# Altium PCB LEDArray8KeyRevB.PcbDoc (part 4 of 4)
Units mm, origin at the board's own origin, x right, y up, seen from the top; angles counter-clockwise.
Board outline 120 x 84.91 mm, 2 copper layers (Top Layer, Bottom Layer); 250 components, 219 nets, 891 pads, 234 vias.
Unrouted connection lines stored in the file: 34.
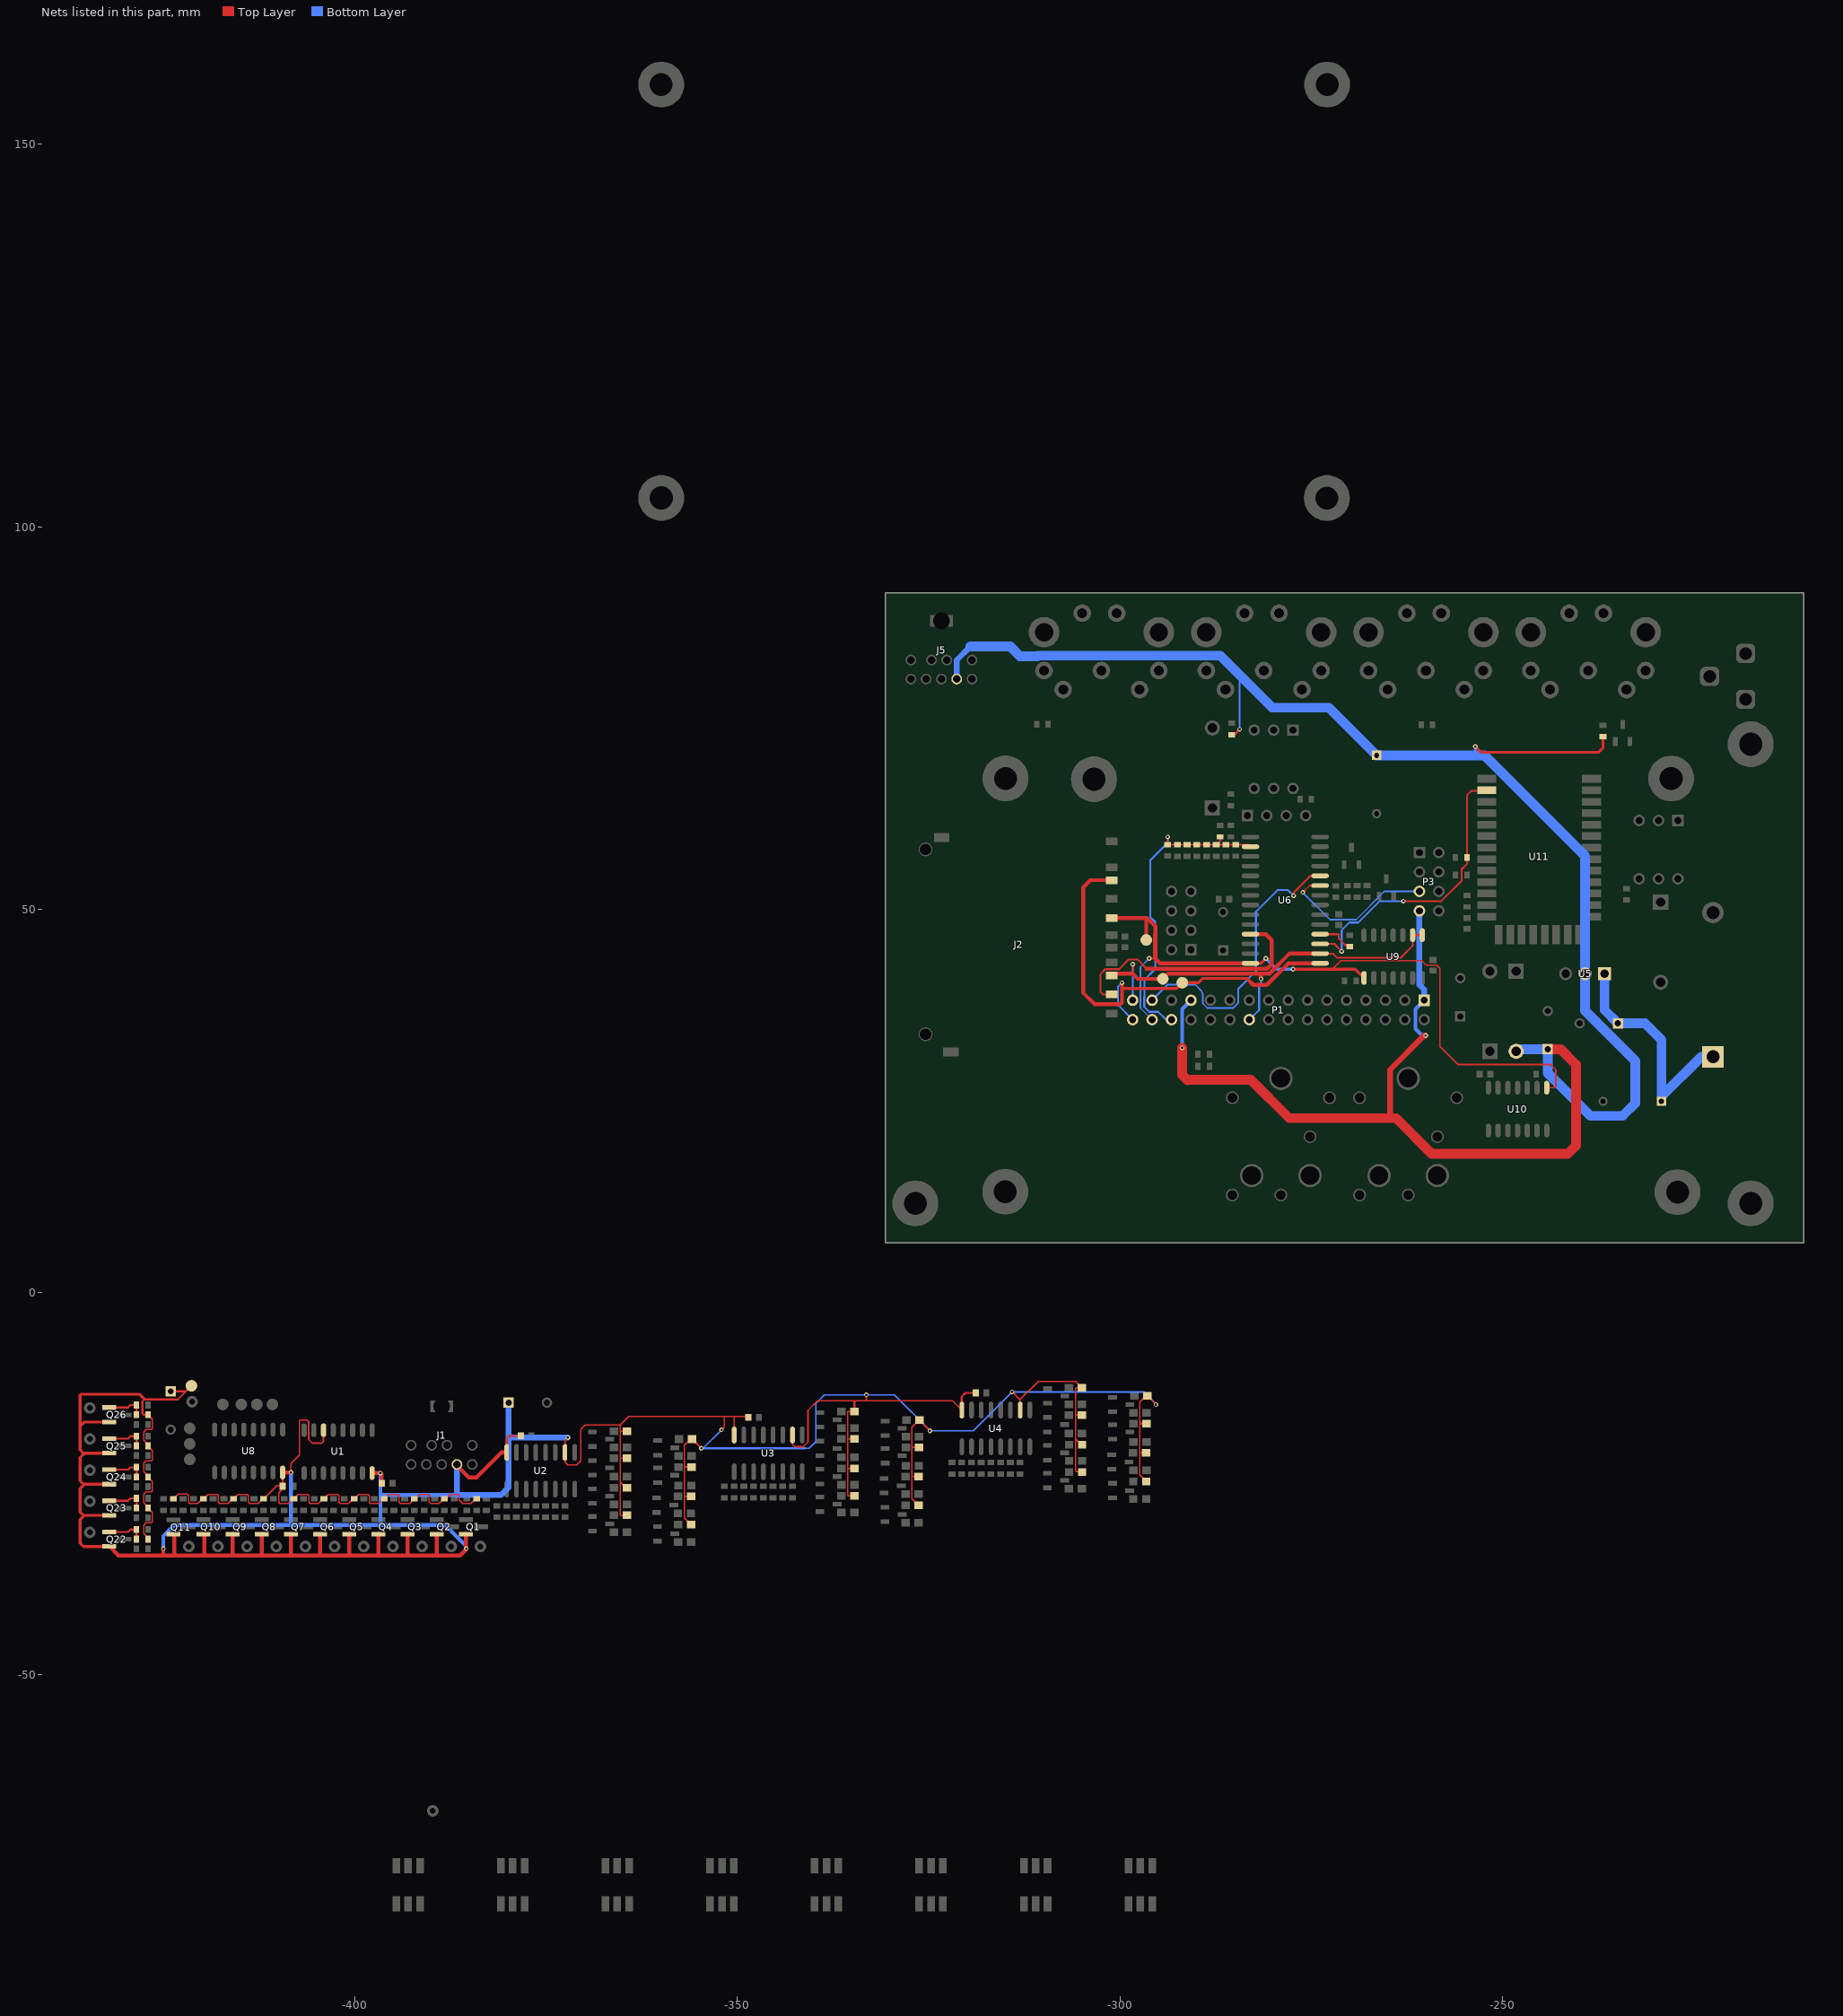
[diagram p4: the nets of this part, all layers, seen from the top]

## Via types
v1: diameter 0.6, hole 0.3, Top Layer to Bottom Layer, 234 vias

## Nets (pads, with @x,y where several pads share a name; then routed paths per layer and width w, separated by ;. In a path a pad name is that pad's centre, name@x,y a point inside that pad or via, vN(x,y) a via of type N, cw(c..) or ccw(c..) an arc to the next point about the centre after c; other vN are vias at no path point) (continued)
SD_CS: J2.1 U6.11 | length 34.1
  Top Layer w0.254: J2.1@-301.081,38.917 -302.232,38.917 -302.531,39.216 -302.531,41.612 -301.947,42.197 -301.922,42.197 -301.896,42.223 -300.118,42.223 -298.848,43.493 -297.705,43.493 -296.562,42.35 -296.562,42.279
  Top Layer w0.508: -296.562,42.279 -280.758,42.279 -280.179,42.858 -280.179,46.033 -280.941,46.795 U6.11@-282.951,46.795
SPARE: P3.5 U6.23 | length 20.9
  Top Layer w0.203: v1(-276.115,52.256) -275.226,53.145 U6.23@-273.851,53.145
  Bottom Layer w0.203: v1(-276.115,52.256) -272.559,48.7 -269.13,48.7 -265.447,52.383 P3.5@-260.875,52.383
SPARE1: Q22.1 R82.2 R92.2 | length 5
  Top Layer w0.254: Q22.1@-432.038,-31.308 -429.58,-31.308 -429.26,-30.988 R92.2@-428.486,-30.988 R82.2@-428.486,-32.258
SPARE2: Q23.1 R83.2 R93.2 | length 5
  Top Layer w0.254: Q23.1@-432.038,-27.244 -429.58,-27.244 -429.26,-26.924 R93.2@-428.486,-26.924 R83.2@-428.486,-28.194
SPARE3: Q24.1 R84.2 R94.2 | length 5
  Top Layer w0.254: Q24.1@-432.038,-23.18 -429.58,-23.18 -429.26,-22.86 R94.2@-428.486,-22.86 R84.2@-428.486,-24.13
SPARE4: Q25.1 R85.2 R95.2 | length 5
  Top Layer w0.254: Q25.1@-432.038,-19.116 -429.58,-19.116 -429.26,-18.796 R95.2@-428.486,-18.796 R85.2@-428.486,-20.066
SPARE5: Q26.1 R86.2 R96.2 | length 5
  Top Layer w0.254: Q26.1@-432.038,-15.052 -429.58,-15.052 -429.26,-14.732 R96.2@-428.486,-14.732 R86.2@-428.486,-16.002
SPI_CLK: J2.5 P1.30 pad.0@-296.563,46.033 U6.14 U9.8 U10.8 | length 100.1
  Top Layer w0.203: v1(-296.181,43.62) -295.419,43.62 ; -272.307,42.223 -272.26,42.223 -271.164,43.319 -260.576,43.319 -259.988,42.731 -258.589,42.731 -258.543,42.685 ; -258.542,42.685 -258.208,42.351 -258.208,32.151 -255.808,29.751 -243.73,29.751 -243.044,29.065 -243.044,26.983 -243.292,26.735 U10.8@-244.245,26.735
  Top Layer w0.381: U6.14@-282.951,42.985 -281.576,42.985 v1(-280.941,43.62) ; v1(-277.385,42.223) -272.307,42.223 ; -272.26,42.223 -269.263,42.223 U9.8@-268.114,41.074
  Top Layer w0.508: J2.5@-301.081,48.917 -296.469,48.917 ; pad.0@-296.563,46.033 -296.563,48.823 -296.469,48.917 ; -295.419,43.62 -295.419,46.758 ; U6.14@-282.951,42.985 -294.784,42.985 -295.363,43.565 -295.363,47.811 -296.469,48.917
  Bottom Layer w0.203: v1(-296.181,43.62) -297.324,42.477 -297.324,37.143 P1.30@-295.8,35.619
  Bottom Layer w0.381: v1(-280.941,43.62) -279.544,42.223 v1(-277.385,42.223)
SPI_MISO: J2.7 P1.32 pad.0@-291.863,40.445 U6.15 | length 60.1
  Top Layer w0.254: -283.38,40.958 -283.354,41.022
  Top Layer w0.381: -299.734,39.683 -292.625,39.683 pad.0@-291.863,40.445 -289.715,40.445 -289.139,41.022 -283.354,41.022
  Top Layer w0.508: J2.7@-301.081,53.847 -303.861,53.847 -304.817,52.891 -304.817,39.148 -303.32,37.651 -299.963,37.651 -299.734,37.88 -299.734,39.683 v1(-299.734,40.448) ; -283.38,40.958 -282.588,40.166 -280.814,40.166 -277.994,42.985 U6.15@-273.851,42.985
  Bottom Layer w0.254: v1(-299.734,40.448) -300.245,39.937 -300.245,37.524 P1.32@-298.34,35.619
SPI_MOSI: J2.2 P1.20 P1.31 pad.0@-294.403,40.953 U6.16 U9.1 U9.2 | length 57.2
  Top Layer w0.254: -298.34,41.618 v1(-298.34,42.858) ; U6.16@-273.851,44.255 -272.178,44.255 -271.623,43.7 -263.335,43.7 -261.764,45.271 U9.2@-261.764,46.674 U9.1@-260.494,46.674
  Top Layer w0.508: J2.2@-301.081,41.417 -300.88,41.618 -298.34,41.618 -297.675,40.953 pad.0@-294.403,40.953 -293.738,41.618 -281.576,41.618 ; v1(-281.576,40.953) -281.576,41.618 ; U6.16@-273.851,44.255 -277.848,44.255 -280.485,41.618 -281.576,41.618
  Bottom Layer w0.254: P1.31@-298.34,38.159 v1(-298.34,42.858) ; P1.20@-283.1,35.619 -281.83,36.889 -281.83,40.191 -281.576,40.445 v1(-281.576,40.953)
TP_CS: P1.29 U6.24 | length 38.5
  Top Layer w0.254: v1(-277.301,51.816) -277.301,52.213 -275.099,54.415 U6.24@-273.851,54.415
  Bottom Layer w0.203: -290.163,40.191 -289.317,39.345 -289.317,39.2 -289.184,39.066 -289.184,37.743 -288.596,37.155 -285.188,37.155 -285.175,37.169
  Bottom Layer w0.254: P1.29@-295.8,38.159 -293.768,40.191 -290.163,40.191 ; -285.175,37.169 -284.536,37.808 -284.536,39.672 -282.236,41.972 -282.236,49.731 -279.417,52.551 -278.036,52.551 v1(-277.301,51.816)
TP_IRQ: P1.28 R59.1 R66.2 R67.2 R68.1 R69.2 R70.1 R71.1 R72.1 R73.1 U6.2 | length 41.5
  Top Layer w0.254: v1(-293.768,59.495) R70.1@-293.768,58.493 -293.768,58.467 -292.51,58.467 R71.1@-292.498,58.479 ; R71.1@-292.49,58.487 -291.228,58.487 -289.958,58.487 R68.1@-288.688,58.487 ; R68.1@-288.688,58.479 R68.1@-288.688,58.487 ; R69.2@-287.418,58.479 R69.2@-287.41,58.487 ; R59.1@-286.91,59.507 -286.91,58.987 R69.2@-287.41,58.487 ; U6.2@-282.951,58.225 -283.213,58.487 R66.2@-284.856,58.487 -286.148,58.487 R69.2@-287.41,58.487 ; R68.1@-288.688,58.487 R69.2@-287.41,58.487
  Bottom Layer w0.254: v1(-293.768,59.495) -293.768,58.717 -296.028,56.457 -296.028,49.03 -295.397,48.399 -295.397,42.245 -296.816,40.826 -296.816,38.612 -296.829,38.599 -296.829,37.284 -296.194,36.649 -294.991,36.649 -293.962,35.619 P1.28@-293.26,35.619
TX1: R65_IO1.2 U6.18 | length 4.9
  Top Layer w0.254: U6.18@-273.851,46.795 -271.404,46.795 -271.404,46.208 -270.568,45.373 -270.18,45.373 R65_IO1.2@-269.963,45.156
TX2: R65_IO2.2 U6.17 U11.2 | length 37.8
  Top Layer w0.254: U6.17@-273.851,45.525 -272.009,45.525 v1(-271.035,44.551) ; v1(-262.963,51.113) -258.032,51.113 -255.363,53.782 -255.363,55.251 -254.664,55.951 R65_IO2.2@-254.664,56.828 -254.664,64.944 -254.108,65.5 U11.2@-252.92,65.5
  Bottom Layer w0.254: v1(-271.035,44.551) -271.035,47.305 -270.021,48.319 -268.864,48.319 -266.07,51.113 v1(-262.963,51.113)
VCC: C1.1 C2.1 C3.2 C4.2 C5.2 C7.1 C14.1 C15.1 C17.1 D1.1 J1.8 J5.8 P1.1 P1.25 P3.7 pad.0@-421.31,-12.217 Q1.2 Q2.2 Q3.2 Q4.2 Q5.2 Q6.2 Q7.2 Q8.2 Q9.2 Q10.2 Q11.2 Q22.2 Q23.2 Q24.2 Q25.2 Q26.2 R2_NPNA.1 R2_NPNB.1 R2_NPNC.1 R5_NPNA.1 R5_NPNB.1 R5_NPNC.1 R8_NPNA.1 R8_NPNB.1 R8_NPNC.1 R11_NPNA.1 R11_NPNB.1 R11_NPNC.1 R14_NPNA.1 R14_NPNB.1 R14_NPNC.1 R17_NPNA.1 R17_NPNB.1 R17_NPNC.1 R20_NPNA.1 R20_NPNB.1 R20_NPNC.1 R23_NPNA.1 R23_NPNB.1 R23_NPNC.1 R36.1 R37.1 R38.1 R39.1 R40.1 R41.1 R42.1 R43.1 R44.1 R45.1 R46.1 R64_IO1.2 R64_IO2.2 R82.1 R83.1 R84.1 R85.1 R86.1 U1.6 U1.16 U2.10 U2.16 U3.10 U3.16 U4.10 U4.16 U5.3 U8.16 | length 889.9
  Top Layer w0.152: R82.1@-426.986,-32.258 -426.986,-32.111 -427.565,-31.533 -427.565,-30.443 -427.264,-30.143 -426.541,-30.143 -426.407,-30.009 -426.407,-28.785 -426.986,-28.207 R83.1@-426.986,-28.194 -426.986,-28.047 -427.565,-27.469 -427.565,-26.379 -427.264,-26.079 -426.541,-26.079 -426.407,-25.945 -426.407,-24.721 -426.986,-24.143 R84.1@-426.986,-24.13 -426.986,-23.983 -427.565,-23.405 -427.565,-22.315 -427.264,-22.015 -426.541,-22.015 -426.407,-21.881 -426.407,-20.657 -426.986,-20.079 R85.1@-426.986,-20.066 -426.986,-19.919 -427.565,-19.341 -427.565,-18.251 -427.264,-17.951 -426.541,-17.951 -426.407,-17.817 -426.407,-16.593 -426.986,-16.015 R86.1@-426.986,-16.002 ; R46.1@-423.689,-27.004 -423.042,-26.357 -421.911,-26.357 -421.7,-26.567 -421.7,-27.449 -421.566,-27.582 -420.477,-27.582 -419.899,-27.004 R45.1@-419.752,-27.004 -419.173,-26.425 -417.937,-26.425 -417.803,-26.559 -417.803,-27.409 -417.629,-27.582 -416.54,-27.582 -415.962,-27.004 R44.1@-415.815,-27.004 -415.236,-26.425 -414,-26.425 -413.866,-26.559 -413.866,-27.409 -413.692,-27.582 -412.603,-27.582 -412.025,-27.004 R43.1@-411.878,-27.004 -410.102,-25.228 C1.1@-409.389,-25.228 ; C1.1@-409.403,-25.341 C1.1@-409.389,-25.228 ; -390.161,-27.5 -390.153,-27.5 ; R36.1@-384.065,-27.004 -384.212,-27.004 -384.79,-27.582 -385.879,-27.582 -386.307,-27.155 -386.307,-26.559 -386.441,-26.425 -387.53,-26.425 -388.109,-27.004 R37.1@-388.256,-27.004 -388.403,-27.004 -388.981,-27.582 -390.07,-27.582 ; v1(-372.127,-18.991) -372.508,-19.372 U2.10@-372.508,-20.919 -372.508,-22.166 -372.127,-22.547 -370.984,-22.547 -370.45,-22.013 -370.45,-17.899 -369.891,-17.34 -365.269,-17.34 -365.269,-18.139 ; R20_NPNA.1@-364.419,-21.695 -365.269,-21.695 ; R23_NPNA.1@-364.419,-18.139 -365.269,-18.139 ; R14_NPNA.1@-364.406,-29.137 -364.42,-29.151 -365.269,-29.151 -365.269,-24.782 ; R17_NPNA.1@-364.401,-25.544 -364.507,-25.544 -365.269,-24.782 ; R5_NPNA.1@-356.037,-26.638 -356.887,-26.638 ; R11_NPNA.1@-356.037,-19.145 -356.15,-19.258 -356.887,-19.995 -356.887,-26.638 ; R2_NPNA.1@-356.019,-30.36 -356.037,-30.321 -356.887,-29.471 -356.887,-26.638 ; R20_NPNB.1@-334.701,-19.155 -335.551,-19.155 ; R23_NPNB.1@-334.701,-15.599 -335.551,-15.599 -335.551,-19.155 ; R14_NPNB.1@-334.688,-26.597 -334.702,-26.611 -335.551,-26.611 -335.551,-23.055 ; R17_NPNB.1@-334.683,-23.004 -335.5,-23.004 -335.551,-23.055 ; R5_NPNB.1@-326.319,-24.098 -327.169,-24.098 ; R2_NPNB.1@-326.301,-27.82 -326.319,-27.781 -327.169,-26.931 -327.169,-24.098 ; R8_NPNB.1@-326.266,-20.237 R8_NPNB.1@-326.266,-20.282 -327.148,-20.282 -327.169,-20.261 ; R11_NPNB.1@-326.192,-16.679 -327.169,-17.656 -327.169,-20.261 ; v1(-314.088,-13.022) -313.043,-14.066 ; U4.10@-313.043,-15.381 -313.043,-14.066 ; R20_NPNC.1@-304.962,-16.041 -305.812,-16.041 ; R14_NPNC.1@-304.949,-23.483 -304.996,-23.436 -305.706,-23.436 -305.812,-23.33 -305.812,-19.128 ; R17_NPNC.1@-304.944,-19.89 -305.05,-19.89 -305.812,-19.128 ; R5_NPNC.1@-296.58,-20.984 -297.43,-20.984 ; R11_NPNC.1@-296.58,-13.491 -296.693,-13.604 -297.43,-14.341 -297.43,-20.984 ; R2_NPNC.1@-296.562,-24.706 -296.58,-24.667 -297.43,-23.817 -297.43,-20.984 ; C1.1@-409.389,-25.228 -409.389,-25.69 -409.889,-26.191 -409.889,-27.449 -409.755,-27.582 -408.666,-27.582 -408.088,-27.004 R42.1@-407.941,-27.004 -407.362,-26.425 -406.126,-26.425 -405.992,-26.559 -405.992,-27.409 -405.818,-27.582 -404.729,-27.582 -404.151,-27.004 R41.1@-404.004,-27.004 -403.425,-26.425 -402.189,-26.425 -402.055,-26.559 -402.055,-27.409 -401.881,-27.582 -400.792,-27.582 -400.214,-27.004 R40.1@-400.067,-27.004 -399.488,-26.425 -398.252,-26.425 -398.078,-26.599 -398.078,-27.449 -397.944,-27.582 -396.855,-27.582 -396.277,-27.004 R39.1@-396.13,-27.004 -395.551,-26.425 -394.315,-26.425 -394.181,-26.559 -394.181,-27.409 -394.007,-27.582 -392.791,-27.582 -392.213,-27.004 R38.1@-392.193,-27.004 -392.066,-27.004 -391.487,-26.425 -390.378,-26.425 -390.244,-26.559 -390.244,-27.409 -390.153,-27.5 ; -390.153,-27.5 -390.07,-27.582 ; -390.153,-27.5 -390.07,-27.582 ; -365.269,-24.782 -365.269,-21.695 ; -365.269,-21.695 -365.269,-18.139 ; -335.551,-23.055 -335.551,-19.155 ; -327.169,-24.098 -327.169,-20.261 ; -313.043,-14.066 -313.043,-14.009 -310.659,-11.625 -305.822,-11.625 R23_NPNC.1@-304.962,-12.485 -305.812,-12.485 -305.812,-16.041 ; -305.812,-19.128 -305.812,-16.041
  Top Layer w0.203: v1(-408.306,-23.543) -408.306,-22.373 -407.21,-21.277 -407.21,-16.834 -407.077,-16.701 -406.216,-16.701 -405.991,-16.926 -405.991,-19.237 -405.53,-19.698 -404.26,-19.698 -404.055,-19.493 U1.6@-404.055,-18.02 ; -365.269,-17.34 -364.163,-16.234 -351.68,-16.234 ; -356.88,-22.801 -356.859,-22.822 R8_NPNA.1@-355.984,-22.822 ; v1(-352.061,-17.975) -351.68,-17.594 -351.68,-16.234 ; U3.16@-350.399,-18.647 -350.399,-16.246 -350.41,-16.234 ; C4.2@-348.57,-16.324 -348.659,-16.234 -350.41,-16.234 ; U3.10@-342.779,-18.647 -342.779,-19.891 -342.498,-20.171 -341.997,-20.171 -341.99,-20.179 -341.369,-20.179 -340.758,-19.568 -340.758,-15.435 -339.488,-14.165 -333.265,-14.165 ; v1(-333.138,-13.403) -333.138,-14.038 -333.265,-14.165 ; U4.16@-320.692,-15.352 -321.879,-14.165 -333.265,-14.165 ; R11_NPNC.1@-296.435,-13.53 v1(-295.292,-14.673) ; -351.68,-16.234 -350.41,-16.234
  Top Layer w0.254: R86.1@-426.986,-16.002 -427.533,-16.002 -427.711,-15.824 -427.711,-14.249 -427.699,-14.249 -427.452,-14.003 -423.095,-14.003 -422.041,-12.949 ; C15.1@-424.028,-12.949 -422.041,-12.949 ; pad.0@-421.31,-12.217 -422.041,-12.949 ; C1.1@-409.389,-25.228 U8.16@-409.389,-23.543 ; U2.16@-380.128,-20.819 -380.128,-19.155 -379.747,-18.774 -378.288,-18.774 C3.2@-378.288,-18.747 ; R11_NPNA.1@-355.892,-19.184 v1(-354.688,-20.388) ; R23_NPNB.1@-334.701,-15.599 -334.701,-14.204 ; R11_NPNB.1@-326.192,-16.679 -326.181,-16.742 v1(-324.82,-18.102) ; U4.16@-320.663,-15.381 -320.692,-15.352 -320.692,-13.657 -320.184,-13.149 C5.2@-318.852,-13.149 ; -297.353,-17.168 R8_NPNC.1@-296.527,-17.168 ; R64_IO1.2@-285.386,72.842 -285.078,72.842 v1(-284.37,73.551)
  Top Layer w0.381: Q22.2@-432.038,-33.208 -435.422,-33.208 -435.864,-32.766 -435.864,-29.718 -435.29,-29.144 ; Q23.2@-432.038,-29.144 -435.29,-29.144 ; Q24.2@-432.038,-25.08 -435.29,-25.08 ; Q25.2@-432.038,-21.016 -435.29,-21.016 ; Q26.2@-432.038,-16.952 -435.29,-16.952 -435.864,-17.526 ; -427.497,-13.958 -428.145,-13.31 -435.712,-13.31 -435.864,-13.462 -435.864,-17.526 ; v1(-253.563,71.306) -252.808,70.551 -237.507,70.551 -236.884,71.174 R64_IO2.2@-236.884,72.588 ; -435.864,-17.526 -435.864,-20.574 -435.422,-21.016 -435.29,-21.016 ; -435.29,-29.144 -435.422,-29.144 -435.864,-28.702 -435.864,-25.654 -435.29,-25.08 ; -435.29,-25.08 -435.422,-25.08 -435.864,-24.638 -435.864,-21.59 -435.29,-21.016
  Top Layer w0.508: Q22.2@-432.038,-33.208 -430.862,-34.384 -425.018,-34.384 ; v1(-424.993,-33.503) -424.993,-34.359 -425.018,-34.384 ; Q11.2@-423.673,-31.625 -423.546,-31.752 -423.546,-34.335 -423.596,-34.384 ; -419.609,-34.053 Q10.2@-419.609,-31.574 ; -415.926,-34.078 Q9.2@-415.926,-31.599 ; -412.116,-34.078 Q8.2@-412.116,-31.599 ; U8.16@-409.389,-23.543 v1(-408.306,-23.543) ; Q7.2@-408.306,-31.599 -408.306,-34.335 -408.356,-34.384 ; -404.496,-34.078 Q6.2@-404.496,-31.599 ; -400.686,-34.078 Q5.2@-400.686,-31.599 ; U1.16@-397.705,-23.62 v1(-396.622,-23.62) -396.449,-23.793 C2.1@-396.449,-24.96 ; Q4.2@-396.876,-31.599 -396.876,-34.284 -396.977,-34.384 ; Q3.2@-393.066,-31.599 -393.066,-34.384 ; Q2.2@-389.256,-31.599 -389.256,-34.383 -389.255,-34.384 ; J1.8@-386.622,-22.498 -386.622,-22.657 -385.081,-24.198 -384.065,-24.198 -380.786,-20.919 U2.16@-380.128,-20.919 ; Q1.2@-385.446,-31.599 -385.446,-33.623 -386.207,-34.384 -389.255,-34.384 ; -425.018,-34.384 -423.596,-34.384 ; -423.596,-34.384 -408.356,-34.384 ; -408.356,-34.384 -396.977,-34.384 ; -396.977,-34.384 -393.066,-34.384 ; -393.066,-34.384 -389.255,-34.384
  Top Layer w0.762: -264.814,22.751 -264.71,22.854 -264.71,29.095 -260.265,33.54 v1(-260.053,33.54)
  Top Layer w1.27: v1(-291.876,31.936) -291.876,28.411 -291.163,27.698 -291.11,27.751 -282.895,27.751 -277.895,22.751 -264.814,22.751 -263.923,22.751 -259.265,18.093 -241.487,18.093 -240.428,19.153 -240.428,29.777 -242.406,31.755 C7.1@-244.111,31.755
  Bottom Layer w0.152: v1@-324.756,-18.102 -319.168,-18.102 v1(-314.088,-13.022)
  Bottom Layer w0.203: v1@-354.474,-20.388 v1(-352.061,-17.975) ; -341.139,-20.388 -340.631,-20.388 -339.742,-19.499 -339.742,-14.546 -338.599,-13.403 v1(-333.138,-13.403) -329.455,-13.403 -324.756,-18.102 v1(-324.82,-18.102) ; v1(-314.088,-13.022) -296.816,-13.022 -295.165,-14.673 v1(-295.292,-14.673)
  Bottom Layer w0.254: v1(-354.688,-20.388) -354.474,-20.388 -341.139,-20.388 ; -287.384,83.117 -284.37,80.103 v1(-284.37,73.551)
  Bottom Layer w0.381: -253.563,70.163 v1(-253.563,71.306)
  Bottom Layer w0.508: v1(-424.993,-33.503) -424.993,-31.851 -423.563,-30.421 ; -423.546,-30.438 -423.563,-30.421 ; v1(-408.306,-23.543) -408.306,-30.421 ; v1(-396.622,-23.62) -396.622,-26.484 ; -386.622,-26.467 -386.605,-26.484 -396.622,-26.484 ; v1(-385.42,-33.503) -385.42,-33.172 -388.171,-30.421 -396.622,-30.421 ; v1(-291.876,31.936) -291.876,37.003 P1.25@-290.72,38.159 ; P1.1@-260.24,38.159 -261.396,37.003 -261.396,34.429 -260.507,33.54 v1(-260.053,33.54) ; -423.563,-30.421 -408.306,-30.421 ; -408.306,-30.421 -396.622,-30.421 ; -396.622,-30.421 -396.622,-26.484
  Bottom Layer w0.762: J1.8@-386.622,-22.498 -386.622,-26.467 -380.862,-26.467 -379.863,-25.468 -379.863,-18.991 ; C14.1@-379.863,-14.419 -379.863,-18.991 ; v1(-372.127,-18.991) -379.863,-18.991 ; J5.8@-321.329,80.118 -321.33,82.592 -319.534,84.387 ; P3.7@-260.875,49.843 -260.875,40.191 -260.24,39.556 P1.1@-260.24,38.159
  Bottom Layer w1.27: -319.534,84.387 -314.327,84.387 -313.057,83.117 -310.79,83.117 -310.725,83.183 -286.89,83.183 -280.101,76.394 -272.693,76.394 C17.1@-266.463,70.163 -253.563,70.163 -252.366,70.163 -239.223,57.021 U5.3@-239.223,41.615 -239.223,36.789 -232.681,30.247 -232.681,24.697 -234.332,23.046 -238.523,23.046 -244.111,28.634 C7.1@-244.111,31.755 -247.975,31.755 D1.1@-248.24,31.489
VIN: C6.1 C16.1 D5.2 U5.1 | length 30.1
  Bottom Layer w1.27: U5.1@-236.683,41.615 -236.683,36.876 C6.1@-234.945,35.138 -231.411,35.138 -229.252,32.979 -229.252,25.586 -224.067,30.771 D5.2@-222.521,30.771
pads on no net: J2. J2.8 J2.9 J2.CD J2.WP J3_IO1.1 J3_IO1.2 J3_IO1.3 J3_IO2.1 J3_IO2.2 J3_IO2.3 J4_IO1.1 J4_IO1.2 J4_IO1.3 J4_IO2.1 J4_IO2.2 J4_IO2.3 J7.MNT J7.RING J7.RING_SH J7.TIP_SH J8.MNT J8.RING J8.RING_SH J8.TIP_SH P1.24 U4.9 U7_IO1.3 U7_IO2.3 U11.3 U11.4 U11.5 U11.6 U11.7 U11.8 U11.9 U11.10 U11.14 U11.15 U11.16 U11.17 U11.18 U11.19 U11.20 U11.23 U11.24 U11.25 U11.26 U11.27 U11.28 U11.29 U11.30 U11.31 U11.32 U11.33 U11.34
copper on no net: | length 22.8
  Bottom Layer w0.254: -283.1,-34.276 -283.1,-11.492

## Polygon pours and split planes (outlines as drawn)
GND on Bottom Layer "MB_GND_B" (hatched 45Degree grid 0.2 track 0.203, remove dead copper, pour order 20): -330.656,6.358 cw(c-330.656,6.485) -330.656,6.613 -231.413,6.613 -231.413,91.27 -330.656,91.27 cw(c-330.656,91.398) -330.656,91.525 -210.656,91.525 cw(c-210.656,91.398) -210.528,91.398 -210.528,6.485 cw(c-210.656,6.485) -210.656,6.358
COM1 on Bottom Layer "LA_COM1_B" (hatched 90Degree grid 0.2 track 0.203, remove dead copper, pour order 22): -404.133,-87.364 ccw(c-404.006,-87.364) -404.006,-87.491 -392.957,-87.491 ccw(c-392.957,-87.364) -392.866,-87.453 -392.867,-87.454 -387.189,-81.776 -301.57,-81.776 -295.765,-87.581 -295.765,-87.58 ccw(c-295.675,-87.491) -295.675,-87.618 -285.896,-87.618 ccw(c-285.896,-87.491) -285.768,-87.491 -285.768,-63.488 ccw(c-285.896,-63.488) -285.896,-63.36 -298.977,-63.36 ccw(c-298.977,-63.488) -299.067,-63.398 -301.099,-65.43 -301.098,-65.429 ccw(c-301.009,-65.52) -301.136,-65.52 -301.136,-69.964 -385.336,-69.964 ccw(c-385.464,-69.965) -385.374,-69.875 -391.851,-63.398 -391.85,-63.398 ccw(c-391.941,-63.488) -391.941,-63.36 -404.006,-63.36 ccw(c-404.006,-63.488) -404.133,-63.488
VIN on Bottom Layer "MB_VIN_B" (hatched 45Degree grid 0.2 track 0.203, remove dead copper, pour order 21): -330.656,6.358 cw(c-330.656,6.485) -330.656,6.613 -231.413,6.613 -231.413,91.27 -330.656,91.27 cw(c-330.656,91.398) -330.656,91.525 -210.656,91.525 cw(c-210.656,91.398) -210.528,91.398 -210.528,6.485 cw(c-210.656,6.485) -210.656,6.358
VCC on Bottom Layer "MB_VCC_B" (hatched 45Degree grid 0.2 track 0.203, remove dead copper, pour order 18): -330.783,6.485 -330.783,91.398 cw(c-330.656,91.398) -330.656,91.525 -210.656,91.525 cw(c-210.656,91.398) -210.528,91.398 cw(c-210.656,91.398) -210.656,91.27 -231.158,91.27 -231.158,6.613 -210.656,6.613 cw(c-210.656,6.485) -210.528,6.485 cw(c-210.656,6.485) -210.656,6.358 -330.656,6.358 cw(c-330.656,6.485)
+3V3 on Bottom Layer "MB_3V3_B" (hatched 45Degree grid 0.2 track 0.203, remove dead copper, pour order 17): -306.28,29.159 -308.756,31.635 -308.756,63.385 -293.516,63.385 -289.706,67.195 -255.416,67.195 -251.606,63.385 -251.606,35.445 -250.336,34.175 -250.336,29.159
VCC on Bottom Layer "LC_VCC_B" (hatched 90Degree grid 0.2 track 0.203, remove dead copper, pour order 23): -436.684,-34.695 -436.657,-11.72 cw(c-436.529,-11.72) -436.619,-11.63 -436.053,-11.064 cw(c-435.963,-11.154) -435.963,-11.027 -283.356,-10.909 cw(c-283.356,-11.037) -283.229,-11.027 cw(c-283.102,-11.037) -282.974,-11.037 -282.974,-34.786 cw(c-283.102,-34.786) -283.102,-34.913 -293.008,-34.913 cw(c-293.008,-34.786) -293.009,-34.913 -436.557,-34.823 cw(c-436.557,-34.695)
COM1 on Top Layer "LA_COM1_T" (hatched 45Degree grid 0.2 track 0.203, pour order 16): -395.878,-87.364 ccw(c-395.751,-87.364) -395.749,-87.491 -392.957,-87.491 ccw(c-392.957,-87.364) -392.866,-87.453 -392.867,-87.454 -387.189,-81.776 -301.57,-81.776 -295.765,-87.581 -295.765,-87.58 ccw(c-295.675,-87.491) -295.675,-87.618 -294.405,-87.618 ccw(c-294.405,-87.491) -294.277,-87.491 -294.277,-63.488 ccw(c-294.405,-63.488) -294.405,-63.36 -298.977,-63.36 ccw(c-298.977,-63.488) -299.067,-63.398 -301.099,-65.43 -301.098,-65.429 ccw(c-301.009,-65.52) -301.136,-65.52 -301.136,-69.964 -385.336,-69.964 ccw(c-385.464,-69.965) -385.374,-69.875 -391.851,-63.398 -391.85,-63.398 ccw(c-391.941,-63.488) -391.941,-63.36 -395.751,-63.36 ccw(c-395.751,-63.488) -395.878,-63.488
GND on Top Layer "MB_GND_T" (hatched 45Degree grid 0.2 track 0.203, remove dead copper, pour order 19): -330.656,6.485 -210.656,6.485 -210.656,91.398 -330.656,91.398
GND on Top Layer "LC_GND_T" (hatched 90Degree grid 0.2 track 0.203, remove dead copper, pour order 15): -436.684,-34.696 -436.657,-11.72 cw(c-436.529,-11.72) -436.619,-11.63 -436.053,-11.064 cw(c-435.963,-11.154) -435.963,-11.027 -283.356,-10.909 cw(c-283.356,-11.037) -283.229,-11.027 cw(c-283.102,-11.037) -282.974,-11.037 -282.974,-34.786 cw(c-283.102,-34.786) -283.102,-34.913 -293.008,-34.913 cw(c-293.008,-34.786) -293.009,-34.913 -436.557,-34.823 cw(c-436.557,-34.696)

## Keep-outs
Keep-Out Layer:
  circle w0.254: c-359.935,157.793 r1.5
  circle w0.254: c-359.935,157.793 r3
  circle w0.254: c-359.931,103.793 r1.5
  circle w0.254: c-359.931,103.793 r3
  circle w0.254: c-272.961,103.783 r1.5
  circle w0.254: c-272.961,103.783 r3
  circle w0.254: c-272.935,157.793 r1.5
  circle w0.254: c-272.935,157.793 r3
  lines w0.254: -363.935,157.793 -359.935,157.793 -359.935,161.793 ; -363.931,103.793 -359.931,103.793 -359.931,99.793 ; -363.905,151.143 -273.969,151.143 ; -361.416,110.484 -361.416,151.124 ; -361.416,111.74 -361.416,110.504 -273.971,110.504 -273.969,110.503 -271.429,110.503 ; -272.961,99.783 -272.961,103.783 ; -272.935,161.793 -272.935,157.793 -268.935,157.793 ; -271.895,110.503 -271.429,110.503 ; -271.429,151.143 -271.429,110.503 ; -271.425,110.507 -271.429,110.503 ; -363.931,100.793 ccw(c-362.925,100.793) -362.925,99.787 -269.961,99.787 ccw(c-269.961,100.787) -268.961,100.787 -268.961,160.789 ccw(c-269.961,160.789) -269.961,161.789 -362.931,161.789 ccw(c-362.931,160.789) -363.931,160.789 -363.931,100.793

## Silkscreen, mask and mechanical layers (free items; w line width, h text height)
Top Overlay:
  lines w0.254: -294.225,-85.869 -286.281,-85.869 ; -294.225,-84.878 -286.281,-84.878 ; -294.225,-83.888 -286.281,-83.888 ; -294.225,-82.897 -286.281,-82.897 ; -294.225,-81.907 -286.281,-81.907 ; -294.225,-78.935 -286.281,-78.935 ; -294.225,-77.944 -286.281,-77.944 ; -294.225,-76.954 -286.281,-76.954 ; -294.225,-74.972 -286.281,-74.972 ; -294.225,-73.982 -286.281,-73.982 ; -294.225,-72.991 -286.281,-72.991 ; -294.225,-72.001 -286.281,-72.001 ; -294.225,-71.01 -286.281,-71.01 ; -294.225,-70.019 -286.281,-70.019 ; -294.225,-69.029 -286.281,-69.029 ; -294.225,-67.048 -286.281,-67.048 ; -294.225,-65.066 -286.281,-65.066 ; -289.732,-80.916 -286.281,-80.916 ; -289.648,-79.925 -286.281,-79.925 ; -286.281,-86.86 -286.281,-64.076
  lines w0.5: -294.225,-86.86 -286.281,-86.86 ; -294.225,-85.869 -286.281,-85.869 ; -294.225,-84.878 -286.281,-84.878 ; -294.225,-83.888 -286.281,-83.888 ; -294.225,-82.897 -286.281,-82.897 ; -294.225,-81.907 -286.281,-81.907 ; -294.225,-80.916 -286.281,-80.916 ; -294.225,-79.925 -286.281,-79.925 ; -294.225,-78.935 -286.281,-78.935 ; -294.225,-77.944 -286.281,-77.944 ; -294.225,-76.954 -286.281,-76.954 ; -294.225,-75.963 -286.281,-75.963 ; -294.225,-74.972 -286.281,-74.972 ; -294.225,-73.982 -286.281,-73.982 ; -294.225,-72.991 -286.281,-72.991 ; -294.225,-72.001 -286.281,-72.001 ; -294.225,-71.01 -286.281,-71.01 ; -294.225,-70.019 -286.281,-70.019 ; -294.225,-69.029 -286.281,-69.029 ; -294.225,-68.038 -286.281,-68.038 ; -294.225,-67.048 -286.281,-67.048 ; -294.225,-66.057 -286.281,-66.057 ; -294.225,-65.066 -286.281,-65.066 ; -294.225,-64.076 -286.281,-64.076
  text "PGD" at -281.552,64.096 h0.51
  text "PGC" at -278.784,64.096 h0.51
  text "MCLR" at -284.321,64.071 h0.51
  text "GND" at -258.515,62.344 h0.51 r270
  text "+3V3" at -264.458,57.238 h0.51
  text "+3V3" at -264.433,54.597 h0.51
  text "RB12" at -264.357,49.974 h0.51
  text "VCC" at -263.95,48.856 h0.51
  text "MOSI" at -297.026,41.715 h0.51
  text "MISO" at -290.676,40.445 h0.51
  text "PGC" at -327.806,27.825 h0.51
  text "Music Research Dept." at -327.806,25.285 h1.52
  text "AG Funds Ltd." at -327.806,22.745 h1.52
  text "Auckland NZ" at -327.806,20.205 h1.52
  text "adrian.gin@gmail.com" at -327.806,17.665 h1.52
  text "LED Control Board" at -408.686,-12.049 h0.51
  text "VCC" at -419.989,-12.37 h0.51
  text "RevB" at -408.703,-13.031 h0.51
  text "D" at -416.958,-13.276 h0.51
  text "C" at -414.926,-13.276 h0.51
  text "B" at -412.894,-13.276 h0.51
  text "A" at -410.862,-13.276 h0.51
  text "adrian.gin@gmail.com" at -408.703,-13.911 h0.51
  text "GND" at -420.091,-14.402 h0.51
  text "CLK" at -421.513,-16.649 h0.51
  text "LAT" at -424.053,-20.049 h0.51
  text "DAT" at -424.053,-22.249 h0.51
  text "RevA" at -337.481,-71.053 h0.51
  text "adrian.gin@gmail.com" at -337.481,-71.933 h0.51
Top Paste:
  lines w0.254: -403.561,-85.869 -395.617,-85.869 ; -403.561,-84.878 -395.617,-84.878 ; -403.561,-83.888 -395.617,-83.888 ; -403.561,-82.897 -395.617,-82.897 ; -403.561,-81.907 -395.617,-81.907 ; -403.561,-78.935 -395.617,-78.935 ; -403.561,-76.954 -395.617,-76.954 ; -403.561,-74.972 -395.617,-74.972 ; -403.561,-73.982 -395.617,-73.982 ; -403.561,-72.991 -395.617,-72.991 ; -403.561,-72.001 -395.617,-72.001 ; -403.561,-71.01 -395.617,-71.01 ; -403.561,-70.019 -395.617,-70.019 ; -403.561,-69.029 -395.617,-69.029 ; -403.561,-67.048 -395.617,-67.048 ; -403.561,-65.066 -395.617,-65.066
  lines w0.5: -403.561,-86.86 -395.617,-86.86 ; -403.561,-85.869 -395.617,-85.869 ; -403.561,-84.878 -395.617,-84.878 ; -403.561,-83.888 -395.617,-83.888 ; -403.561,-82.897 -395.617,-82.897 ; -403.561,-81.907 -395.617,-81.907 ; -403.561,-80.916 -395.617,-80.916 ; -403.561,-79.925 -395.617,-79.925 ; -403.561,-78.935 -395.617,-78.935 ; -403.561,-77.944 -395.617,-77.944 ; -403.561,-76.954 -395.617,-76.954 ; -403.561,-75.963 -395.617,-75.963 ; -403.561,-74.972 -395.617,-74.972 ; -403.561,-73.982 -395.617,-73.982 ; -403.561,-72.991 -395.617,-72.991 ; -403.561,-72.001 -395.617,-72.001 ; -403.561,-71.01 -395.617,-71.01 ; -403.561,-70.019 -395.617,-70.019 ; -403.561,-69.029 -395.617,-69.029 ; -403.561,-68.038 -395.617,-68.038 ; -403.561,-67.048 -395.617,-67.048 ; -403.561,-66.057 -395.617,-66.057 ; -403.561,-65.066 -395.617,-65.066 ; -403.561,-64.076 -395.617,-64.076
Bottom Paste:
  lines w0.254: -287.709,-33.287 -283.737,-33.287 ; -287.709,-32.297 -283.737,-32.297 ; -287.709,-31.306 -283.737,-31.306 ; -287.709,-30.315 -283.737,-30.315 ; -287.709,-29.325 -283.737,-29.325 ; -287.709,-26.353 -283.737,-26.353 ; -287.709,-25.362 -283.737,-25.362 ; -287.709,-24.372 -283.737,-24.372 ; -287.709,-23.381 -283.737,-23.381 ; -287.709,-22.391 -283.737,-22.391 ; -287.709,-21.4 -283.737,-21.4 ; -287.709,-20.409 -283.737,-20.409 ; -287.709,-19.419 -283.737,-19.419 ; -287.709,-18.428 -283.737,-18.428 ; -287.709,-17.438 -283.737,-17.438 ; -287.709,-14.466 -283.737,-14.466 ; -287.709,-12.485 -283.737,-12.485
  lines w0.5: -294.225,-86.86 -286.281,-86.86 ; -294.225,-85.869 -286.281,-85.869 ; -294.225,-84.878 -286.281,-84.878 ; -294.225,-83.888 -286.281,-83.888 ; -294.225,-82.897 -286.281,-82.897 ; -294.225,-81.907 -286.281,-81.907 ; -294.225,-80.916 -286.281,-80.916 ; -294.225,-79.925 -286.281,-79.925 ; -294.225,-78.935 -286.281,-78.935 ; -294.225,-77.944 -286.281,-77.944 ; -294.225,-76.954 -286.281,-76.954 ; -294.225,-75.963 -286.281,-75.963 ; -294.225,-74.972 -286.281,-74.972 ; -294.225,-73.982 -286.281,-73.982 ; -294.225,-72.991 -286.281,-72.991 ; -294.225,-72.039 -286.281,-72.039 ; -294.225,-71.01 -286.281,-71.01 ; -294.225,-70.019 -286.281,-70.019 ; -294.225,-69.003 -286.281,-69.003 ; -294.225,-68.038 -286.281,-68.038 ; -294.225,-67.048 -286.281,-67.048 ; -294.225,-66.057 -286.281,-66.057 ; -294.225,-65.066 -286.281,-65.066 ; -294.225,-64.076 -286.281,-64.076 ; -287.709,-34.278 -283.737,-34.278 ; -287.709,-33.287 -283.737,-33.287 ; -287.709,-32.297 -283.737,-32.297 ; -287.709,-31.306 -283.737,-31.306 ; -287.709,-30.315 -283.737,-30.315 ; -287.709,-29.325 -283.737,-29.325 ; -287.709,-28.334 -283.737,-28.334 ; -287.709,-27.344 -283.737,-27.344 ; -287.709,-26.353 -283.737,-26.353 ; -287.709,-25.362 -283.737,-25.362 ; -287.709,-24.372 -283.737,-24.372 ; -287.709,-23.381 -283.737,-23.381 ; -287.709,-22.391 -283.737,-22.391 ; -287.709,-21.4 -283.737,-21.4 ; -287.709,-20.409 -283.737,-20.409 ; -287.709,-19.419 -283.737,-19.419 ; -287.709,-18.428 -283.737,-18.428 ; -287.709,-17.438 -283.737,-17.438 ; -287.709,-16.461 -283.737,-16.461 ; -287.709,-15.456 -283.737,-15.456 ; -287.709,-14.466 -283.737,-14.466 ; -287.709,-13.475 -283.737,-13.475 ; -287.709,-12.485 -283.737,-12.485 ; -287.709,-11.494 -283.737,-11.494
Top Solder:
  lines w0.254: -403.561,-85.869 -395.617,-85.869 ; -403.561,-84.878 -395.617,-84.878 ; -403.561,-83.888 -395.617,-83.888 ; -403.561,-82.897 -395.617,-82.897 ; -403.561,-81.907 -395.617,-81.907 ; -403.561,-78.935 -395.617,-78.935 ; -403.561,-76.954 -395.617,-76.954 ; -403.561,-74.972 -395.617,-74.972 ; -403.561,-73.982 -395.617,-73.982 ; -403.561,-72.991 -395.617,-72.991 ; -403.561,-72.001 -395.617,-72.001 ; -403.561,-71.01 -395.617,-71.01 ; -403.561,-70.019 -395.617,-70.019 ; -403.561,-69.029 -395.617,-69.029 ; -403.561,-67.048 -395.617,-67.048 ; -403.561,-65.066 -395.617,-65.066
  lines w0.5: -403.561,-86.86 -395.617,-86.86 ; -403.561,-85.869 -395.617,-85.869 ; -403.561,-84.878 -395.617,-84.878 ; -403.561,-83.888 -395.617,-83.888 ; -403.561,-82.897 -395.617,-82.897 ; -403.561,-81.907 -395.617,-81.907 ; -403.561,-80.916 -395.617,-80.916 ; -403.561,-79.925 -395.617,-79.925 ; -403.561,-78.935 -395.617,-78.935 ; -403.561,-77.944 -395.617,-77.944 ; -403.561,-76.954 -395.617,-76.954 ; -403.561,-75.963 -395.617,-75.963 ; -403.561,-74.972 -395.617,-74.972 ; -403.561,-73.982 -395.617,-73.982 ; -403.561,-72.991 -395.617,-72.991 ; -403.561,-72.001 -395.617,-72.001 ; -403.561,-71.01 -395.617,-71.01 ; -403.561,-70.019 -395.617,-70.019 ; -403.561,-69.029 -395.617,-69.029 ; -403.561,-68.038 -395.617,-68.038 ; -403.561,-67.048 -395.617,-67.048 ; -403.561,-66.057 -395.617,-66.057 ; -403.561,-65.066 -395.617,-65.066 ; -403.561,-64.076 -395.617,-64.076
Bottom Solder:
  lines w0.254: -287.709,-33.287 -283.737,-33.287 ; -287.709,-32.297 -283.737,-32.297 ; -287.709,-31.306 -283.737,-31.306 ; -287.709,-30.315 -283.737,-30.315 ; -287.709,-29.325 -283.737,-29.325 ; -287.709,-26.353 -283.737,-26.353 ; -287.709,-25.362 -283.737,-25.362 ; -287.709,-24.372 -283.737,-24.372 ; -287.709,-23.381 -283.737,-23.381 ; -287.709,-22.391 -283.737,-22.391 ; -287.709,-21.4 -283.737,-21.4 ; -287.709,-20.409 -283.737,-20.409 ; -287.709,-19.419 -283.737,-19.419 ; -287.709,-18.428 -283.737,-18.428 ; -287.709,-17.438 -283.737,-17.438 ; -287.709,-14.466 -283.737,-14.466 ; -287.709,-12.485 -283.737,-12.485
  lines w0.5: -294.225,-86.86 -286.281,-86.86 ; -294.225,-85.869 -286.281,-85.869 ; -294.225,-84.878 -286.281,-84.878 ; -294.225,-83.888 -286.281,-83.888 ; -294.225,-82.897 -286.281,-82.897 ; -294.225,-81.907 -286.281,-81.907 ; -294.225,-80.916 -286.281,-80.916 ; -294.225,-79.925 -286.281,-79.925 ; -294.225,-78.935 -286.281,-78.935 ; -294.225,-77.944 -286.281,-77.944 ; -294.225,-76.954 -286.281,-76.954 ; -294.225,-75.963 -286.281,-75.963 ; -294.225,-74.972 -286.281,-74.972 ; -294.225,-73.982 -286.281,-73.982 ; -294.225,-72.991 -286.281,-72.991 ; -294.225,-72.039 -286.281,-72.039 ; -294.225,-71.01 -286.281,-71.01 ; -294.225,-70.019 -286.281,-70.019 ; -294.225,-69.003 -286.281,-69.003 ; -294.225,-68.038 -286.281,-68.038 ; -294.225,-67.048 -286.281,-67.048 ; -294.225,-66.057 -286.281,-66.057 ; -294.225,-65.066 -286.281,-65.066 ; -294.225,-64.076 -286.281,-64.076 ; -287.709,-34.278 -283.737,-34.278 ; -287.709,-33.287 -283.737,-33.287 ; -287.709,-32.297 -283.737,-32.297 ; -287.709,-31.306 -283.737,-31.306 ; -287.709,-30.315 -283.737,-30.315 ; -287.709,-29.325 -283.737,-29.325 ; -287.709,-28.334 -283.737,-28.334 ; -287.709,-27.344 -283.737,-27.344 ; -287.709,-26.353 -283.737,-26.353 ; -287.709,-25.362 -283.737,-25.362 ; -287.709,-24.372 -283.737,-24.372 ; -287.709,-23.381 -283.737,-23.381 ; -287.709,-22.391 -283.737,-22.391 ; -287.709,-21.4 -283.737,-21.4 ; -287.709,-20.409 -283.737,-20.409 ; -287.709,-19.419 -283.737,-19.419 ; -287.709,-18.428 -283.737,-18.428 ; -287.709,-17.438 -283.737,-17.438 ; -287.709,-16.461 -283.737,-16.461 ; -287.709,-15.456 -283.737,-15.456 ; -287.709,-14.466 -283.737,-14.466 ; -287.709,-13.475 -283.737,-13.475 ; -287.709,-12.485 -283.737,-12.485 ; -287.709,-11.494 -283.737,-11.494
Mechanical 15:
  lines w0.254: -425.85,-22.848 -382.035,-22.848 -378.987,-22.848 -378.987,-34.786 ; -295.421,-11.037 -283.356,-11.037 -283.102,-11.037 -283.102,-34.786 -293.008,-34.786 ; -294.786,-11.037 -436.012,-11.037 -436.647,-11.671 -436.647,-34.786 -292.246,-34.786 ; -231.286,6.485 -231.286,91.398 ; -210.656,6.485 -210.656,91.398 ; -210.656,6.485 -330.656,6.485 -330.656,91.398 -210.656,91.398 ; -210.656,6.485 -210.656,91.398 ; -395.751,-87.364 -395.751,-63.488 -391.941,-63.488 -385.464,-69.965 -385.337,-70.092 -301.009,-70.092 -301.009,-65.52 -298.977,-63.488 -294.405,-63.488 -294.405,-87.491 -295.675,-87.491 -301.517,-81.649 -387.242,-81.649 -392.957,-87.364 -395.751,-87.364 ; -308.756,31.635 -308.756,63.385 -293.516,63.385 -289.706,67.195 -255.416,67.195 -251.606,63.385 -251.606,35.445 -250.336,34.175 -250.336,29.159 -306.28,29.159 -308.756,31.635

## Text inside footprints (layer, text, board x,y; h text height)
C16: Top Overlay "+" at -224.93,24.214 h1.5
C17: Top Overlay "+" at -262.018,73.592 h1.5 r90
P1: Top Overlay "2" at -257.7,36.127 h1.27 r180; Top Overlay "1" at -257.954,41.207 h1.27 r180; Top Overlay "31" at -297.324,41.334 h1.27 r180; Top Overlay "32" at -297.578,33.714 h1.27 r180
P2: Top Overlay "2" at -292.752,42.223 h1.27 r90; Top Overlay "1" at -290.212,42.604 h1.27 r90; Top Overlay "7" at -288.688,54.415 h1.27 r90; Top Overlay "8" at -293.539,54.161 h1.27 r90
P3: Top Overlay "2" at -258.843,60.13 h1.27 r270; Top Overlay "1" at -261.256,59.749 h1.27 r270; Top Overlay "8" at -258.843,48.065 h1.27 r270
U5: Top Overlay "3" at -238.723,45.29 h1.5 r180; Top Overlay "2" at -241.263,45.29 h1.5 r180; Top Overlay "1" at -236.433,45.29 h1.5 r180